# Altium PCB COMM ARM EUTS.PcbDoc
Units mm, origin at the board's own origin, x right, y up, seen from the top; angles counter-clockwise.
Board outline 95.45 x 90.3 mm, 4 copper layers (Top Layer, Ground, Power, Bottom Layer), stack 1.641 mm thick; 55 components, 68 nets, 300 pads, 123 vias.
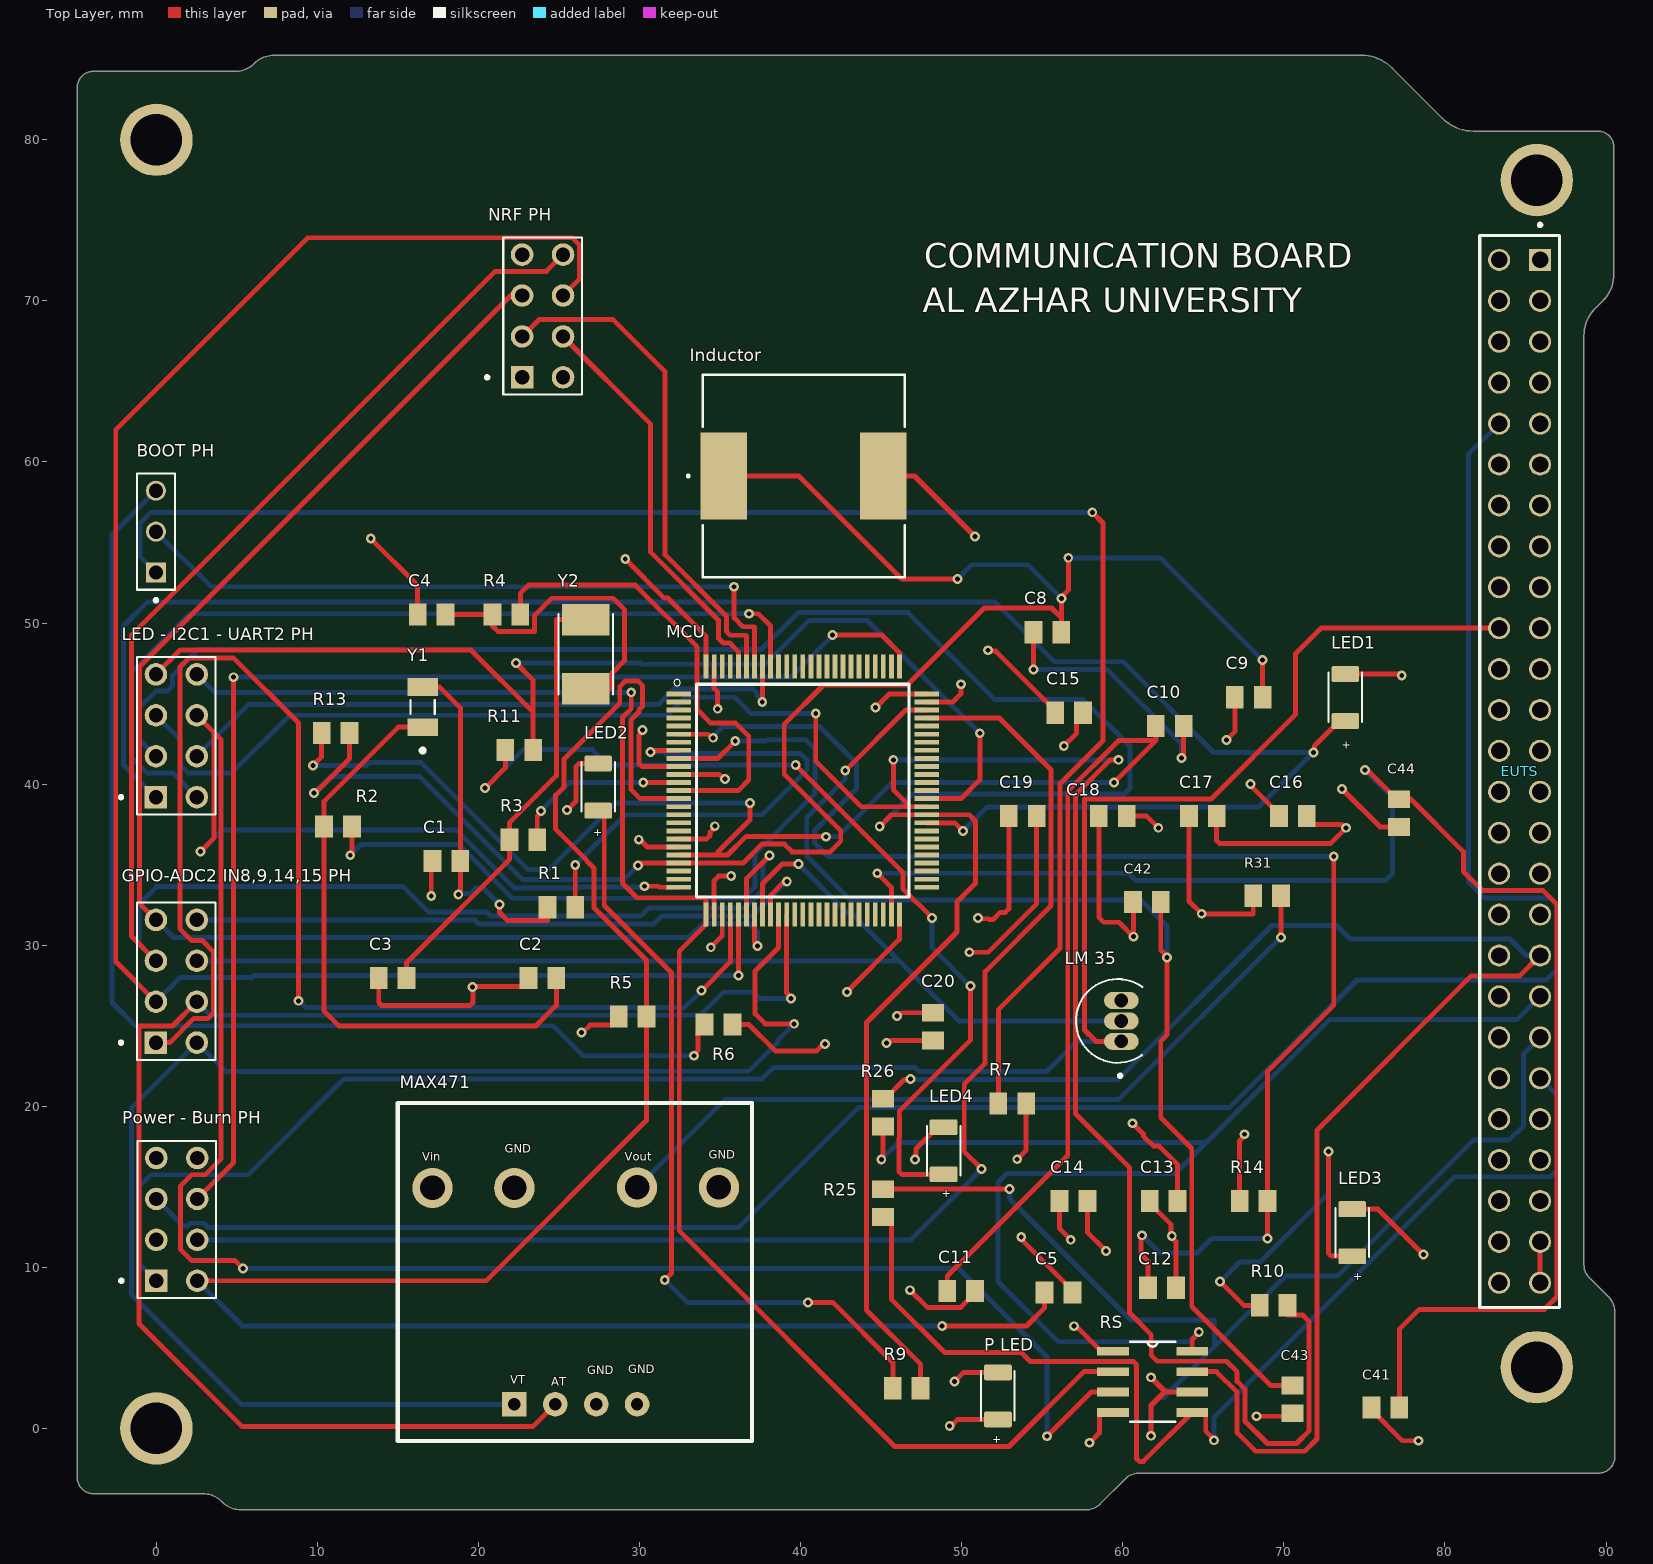
[diagram p0: Top Layer view]
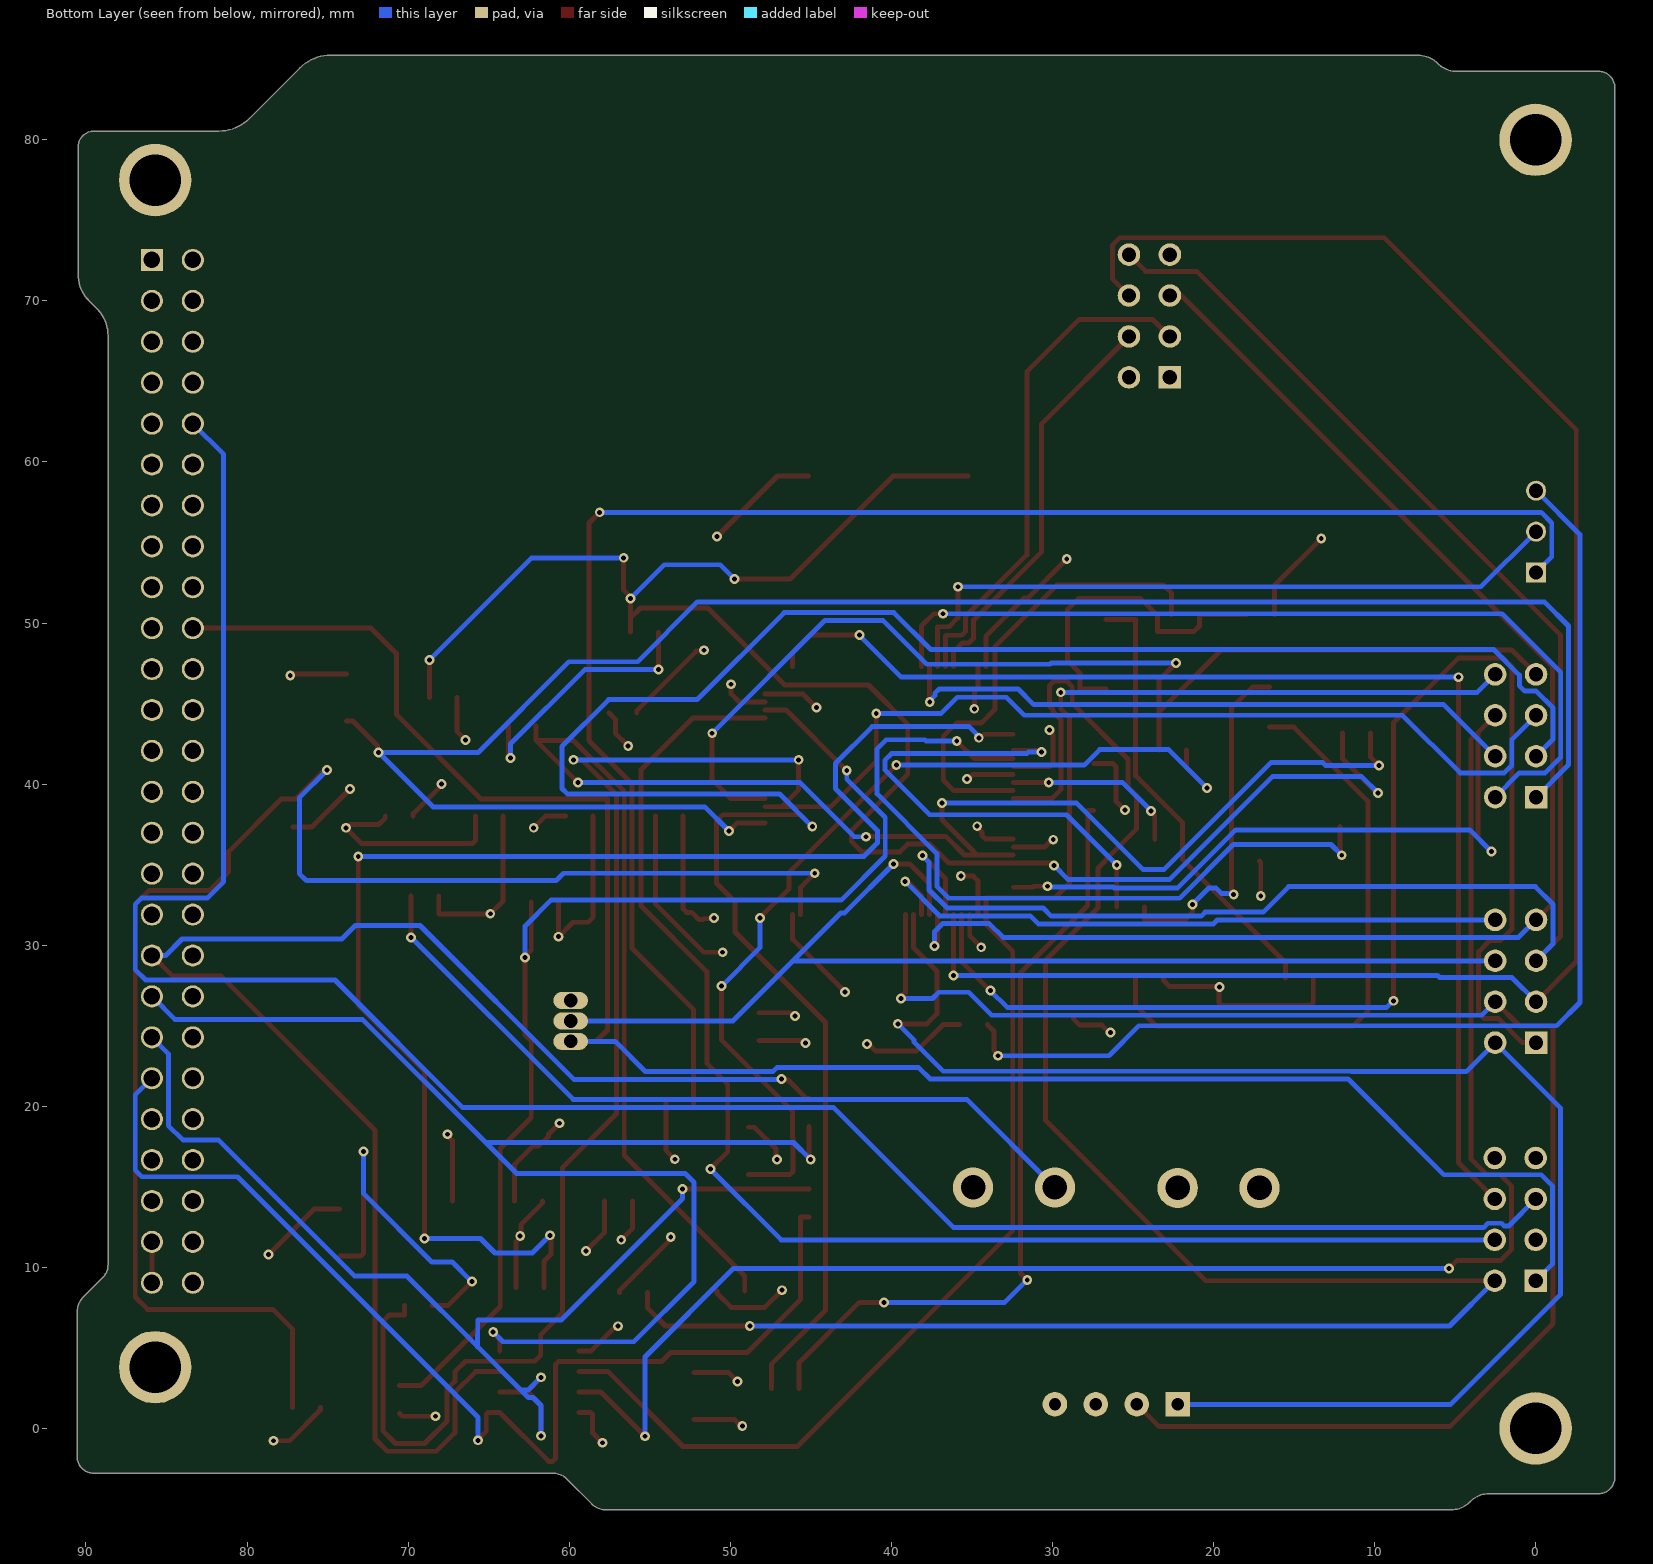
[diagram p1: Bottom Layer view, seen from below]
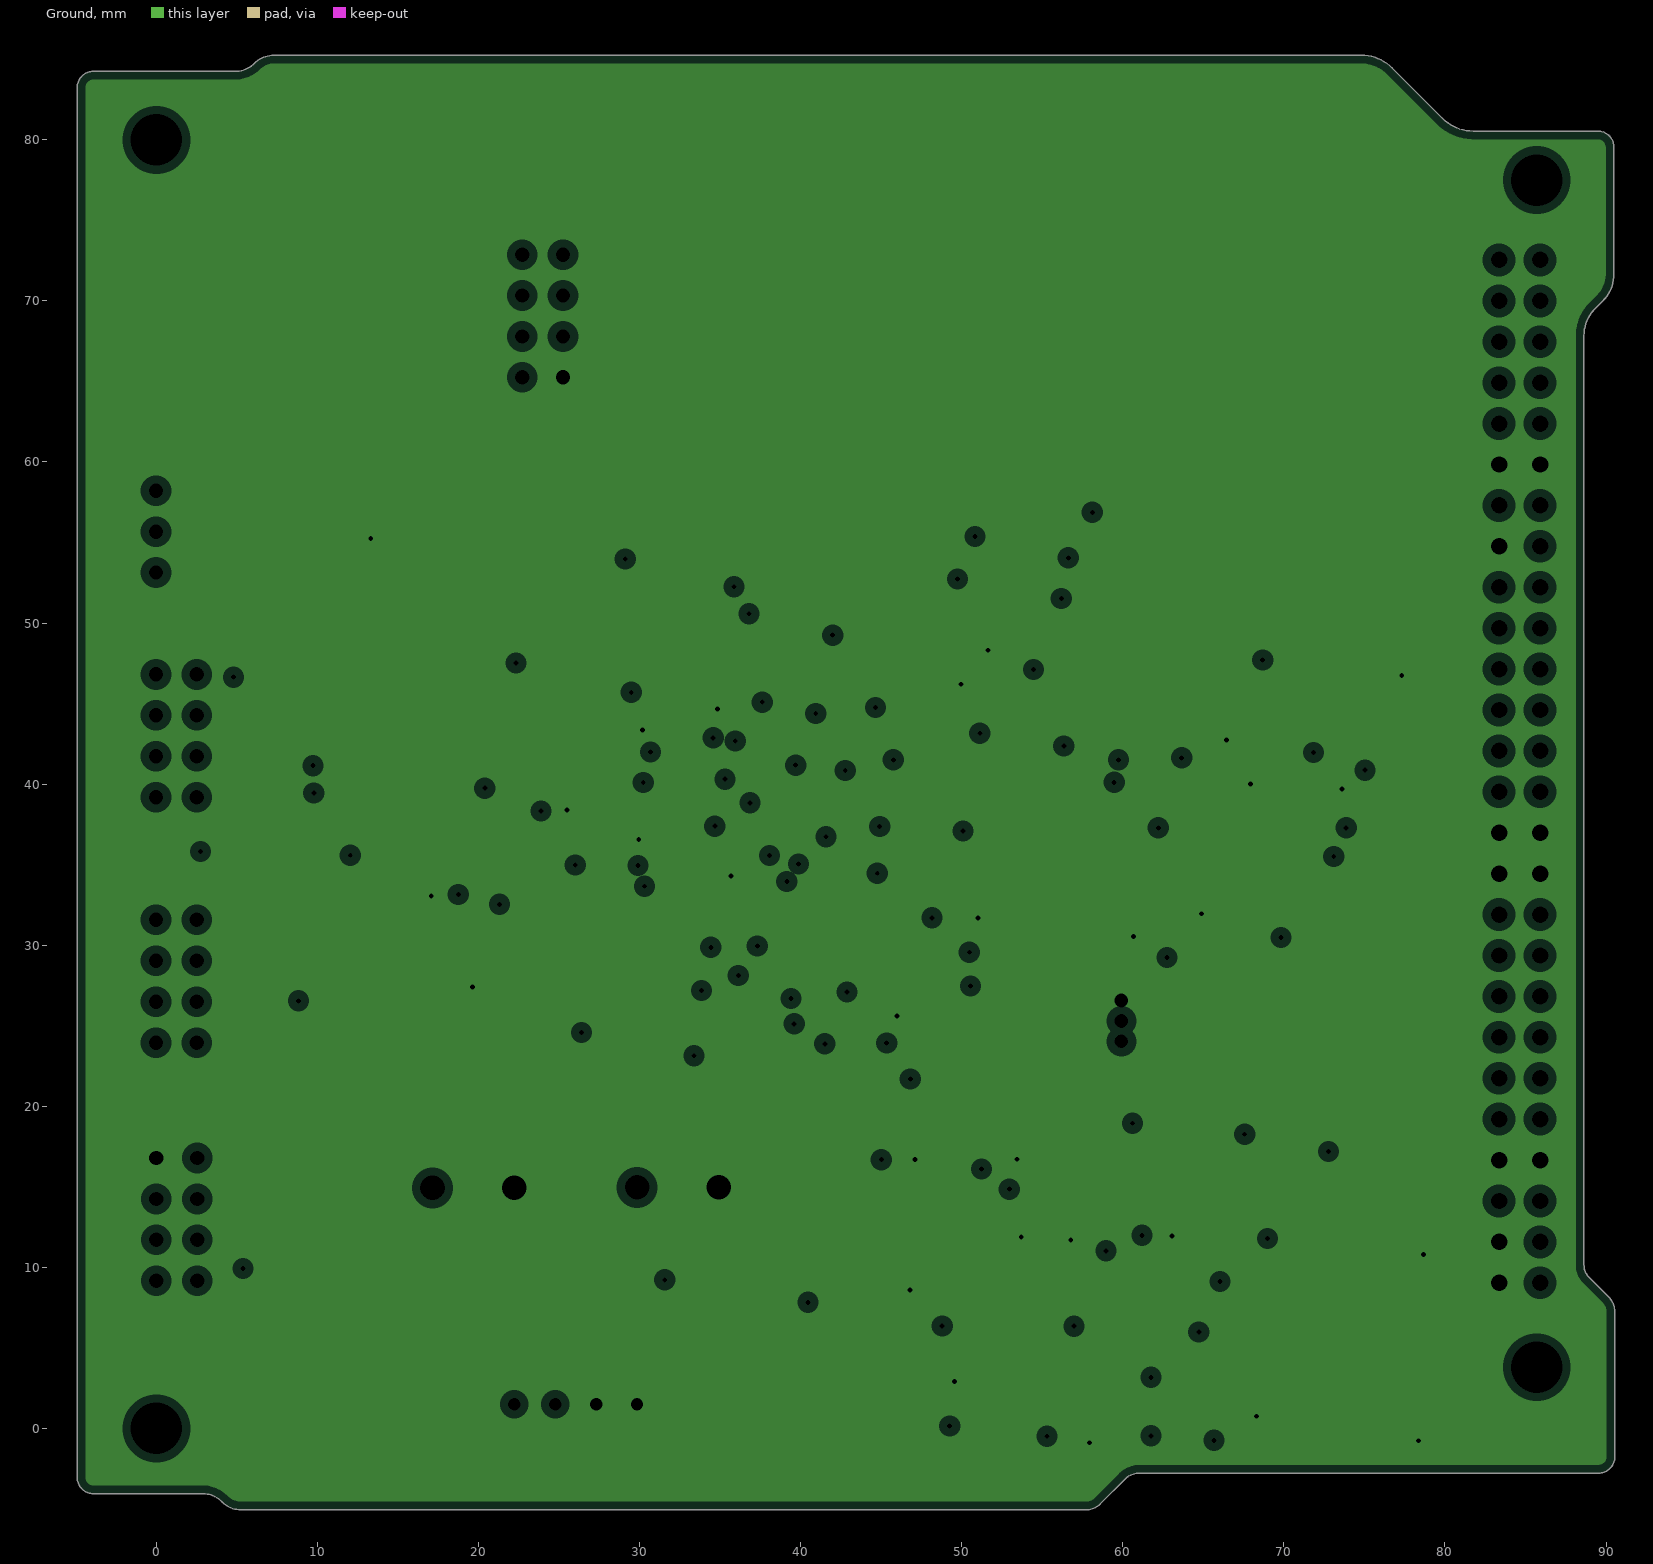
[diagram p2: Ground, clearances drawn from the general rule]
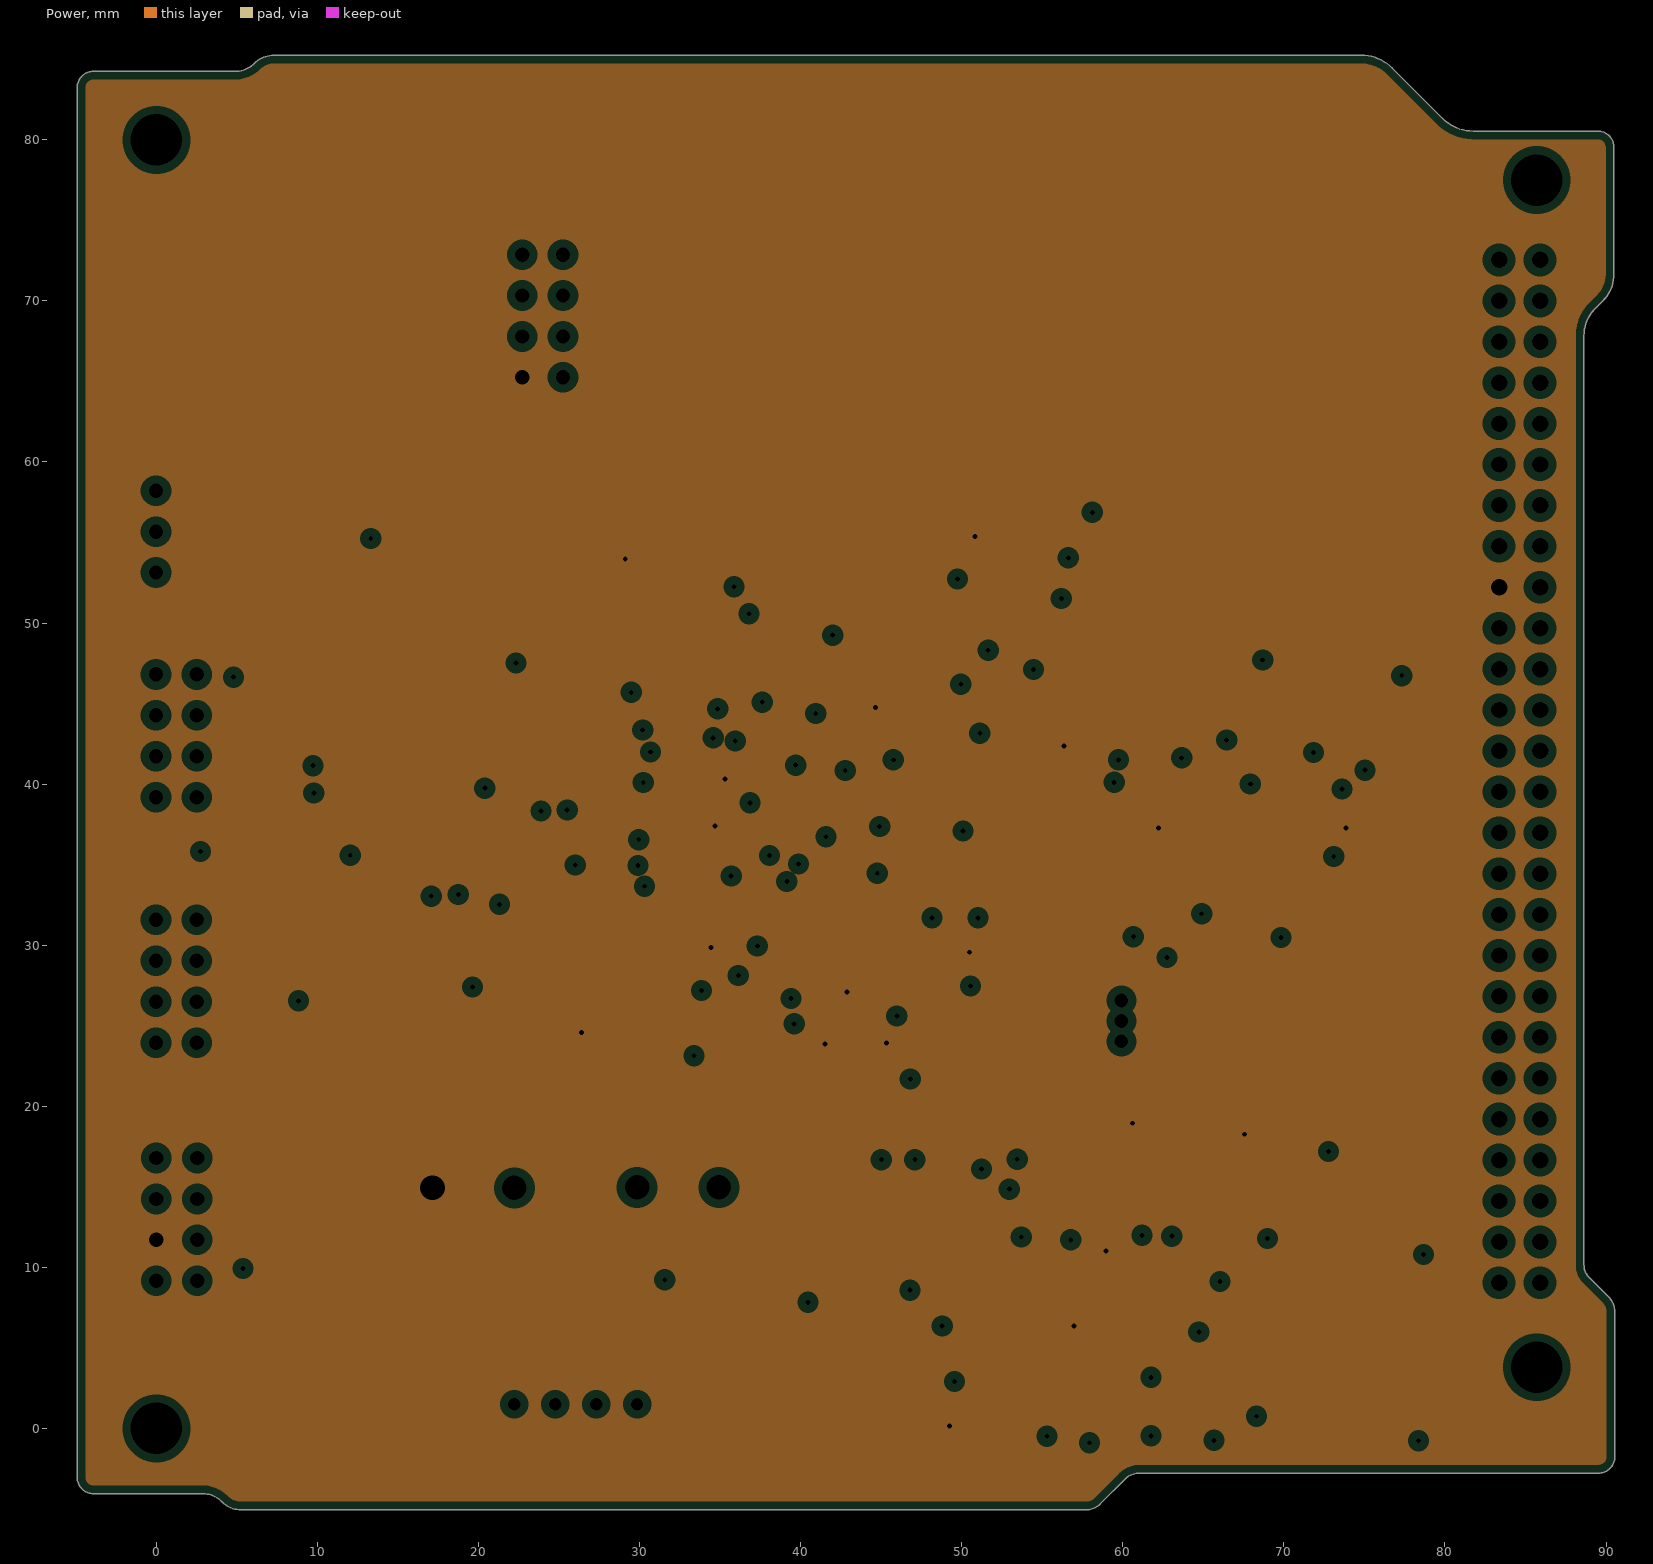
[diagram p3: Power, clearances drawn from the general rule]

## Layer stack, top to bottom
Top Solder: solder mask 0.0102, Solder Resist, Dk 3.5
Top Layer: signal copper 0.0356
Dielectric 1: prepreg 0.1702, FR-4, Dk 4.35
Ground: plane copper 0.0178, net G
Dielectric 3: core 1.1938, FR-4, Dk 4.35
Power: plane copper 0.0178, net 3.3V (COMM)
Dielectric 2: prepreg 0.1702, FR-4, Dk 4.35
Bottom Layer: signal copper 0.0356
Bottom Solder: solder mask 0.0102, Solder Resist, Dk 3.5

## Board outline
2.9,-4.05 cw(c2.9,-5.668) 4.044,-4.524 4.096,-4.576 ccw(c5.24,-3.432) 5.24,-5.05 57.73,-5.05 ccw(c57.73,-3.831) 58.592,-4.693 60.158,-3.127 cw(c61.02,-3.989) 61.02,-2.77 89.54,-2.77 ccw(c89.54,-1.77) 90.54,-1.77 90.54,7.25 ccw(c89.248,7.25) 90.162,8.163 89.625,8.7 88.952,9.373 cw(c89.728,10.15) 88.63,10.15 88.63,67.85 cw(c90.996,67.85) 89.323,69.523 89.797,69.997 ccw(c88.124,71.67) 90.49,71.67 90.49,79.54 ccw(c89.49,79.54) 89.49,80.54 81.75,80.54 cw(c81.75,83.22) 79.855,81.325 76.715,84.465 ccw(c74.82,82.57) 74.82,85.25 7.302,85.25 ccw(c7.302,83.543) 6.095,84.75 cw(c4.888,85.957) 4.888,84.25 -3.91,84.25 ccw(c-3.91,83.25) -4.91,83.25 -4.91,-3.05 ccw(c-3.91,-3.05) -3.91,-4.05

## Design rules (kind name [scope] priority, off if disabled: settings)
Clearance [All] p1: gap=0.254 ignorepadtopadclearanceinfootprint=FALSE except(0: Arc-Hole Track-Hole SMDPad-Hole THPad-Hole Via-Hole Fill-Hole Poly-Hole Region-Hole Text-Hole; 0.178: Arc-Arc Arc-Track Arc-SMDPad Arc-THPad Track-Track Track-SMDPad Track-THPad SMDPad-SMDPad SMDPad-THPad THPad-THPad)
ComponentClearance [All] p1: gap=0.762 collisioncheckmode=3 verticalgap=0.762 showdistances=FALSE
DiffPairsRouting [All] p1: maxlimit=0.254 minlimit=0.254 mostfreqgap=0.254 toplayer_minwidth=0.381 toplayer_maxwidth=0.381 toplayer_prefwidth=0.381 bottomlayer_minwidth=0.381 bottomlayer_maxwidth=0.381 bottomlayer_prefwidth=0.381 substack1={0761D619-B0FF-4D42-81BD-1B94FE1A46B2} toplayer_{0761d619-b0ff-4d42-81bd-1b94fe1a46b2}_minwidth=0.381 toplayer_{0761d619-b0ff-4d42-81bd-1b94fe1a46b2}_maxwidth=0.381 toplayer_{0761d619-b0ff-4d42-81bd-1b94fe1a46b2}_prefwidth=0.381 bottomlayer_{0761d619-b0ff-4d42-81bd-1b94fe1a46b2}_minwidth=0.381 bottomlayer_{0761d619-b0ff-4d42-81bd-1b94fe1a46b2}_maxwidth=0.381 bottomlayer_{0761d619-b0ff-4d42-81bd-1b94fe1a46b2}_prefwidth=0.381 maxuncoupledlength=12.7
HoleSize [All] p1: absolutevalues=TRUE maxlimit=3.302 minlimit=0.025 maxpercent=80.000 minpercent=20.000
HoleToHoleClearance [All] p1: gap=0.152 allowstackedmicrovias=TRUE
MinimumSolderMaskSliver [All] p1: minsoldermaskwidth=0.076
PlaneClearance [All] p1: clearance=0.508
PlaneConnect [All] p1: planeconnectstyle=Relief reliefexpansion=0.508 reliefentries=4 reliefconductorwidth=0.254 reliefairgap=0.254
PolygonConnect [All] p1: connectstyle=Relief reliefconductorwidth=0.254 reliefentries=4 polygonreliefangle="90 Angle" airgapwidth=0.254
RoutingVias [All] p1: holewidth=0.305 width=0.61 viastyle="Through Hole" minholewidth=0.254 minwidth=0.254 maxholewidth=0.305 maxwidth=0.61
SilkToSilkClearance [All] p1: silktosilkclearance=0.102
SilkToSolderMaskClearance [IsPad] p1: minsilkscreentomaskgap=0.102 clearancetoexposedcopper=TRUE
SolderMaskExpansion [All] p1: expansion=0.076 istentingtop=FALSE
Width [All] p1: maxlimit=1.016 minlimit=0.178 preferedwidth=0.305 substack1={0761D619-B0FF-4D42-81BD-1B94FE1A46B2}
21 further rules are at their usual default settings.

## Components (designator, comment, footprint, x,y, rotation, side; value= is the part's Value field where it differs from the comment)
"BOOT PH" "4-103327-5" TE_4-103327-5 -0.025,53.137 r90 top
C1 "6.8pF" CAPC2012X95N 18.009,35.23 r0 top
C2 "6.8pf" CAPC2012X95N 23.97,27.97 r0 top
C3 "20pF" CAPC2012X95N 14.673,27.97 r0 top
C4 "20pf" CAPC2012X95N 17.086,50.525 r0 top
C5 "100nF" CAPC2012X95N 56.007,8.433 r0 top
C8 "100nF" CAPC2012X95N 55.321,49.428 r0 top
C9 "1uF" CAPC2012X95N 67.817,45.39 r0 top
C10 "100nF" CAPC2012X95N 62.916,43.612 r0 top
C11 "1uF" CAPC2012X95N 49.962,8.534 r0 top
C12 "1uF" CAPC2012X95N 62.433,8.738 r0 top
C13 "100nF" CAPC2012X95N 62.527,14.127 r0 top
C14 "100nF" CAPC2012X95N 56.939,14.127 r0 top
C15 "100nF" CAPC2012X95N 56.667,44.425 r0 top
C16 "100nF" CAPC2012X95N 70.553,38.028 r0 top
C17 "100nF" CAPC2012X95N 64.965,38.028 r0 top
C18 "100nF" CAPC2012X95N 59.377,38.028 r0 top
C19 "100nF" CAPC2012X95N 53.789,38.028 r0 top
C20 "100nF" CAPC2012X95N 48.209,24.943 r90 top
C41 "1uF" CAPC2012X95N 76.302,1.295 r0 top
C42 "1uF" CAPC2012X95N 61.493,32.69 r0 top
C43 "1uF" CAPC2012X95N 70.536,1.803 r90 top
C44 "1uF" CAPC2012X95N 77.14,38.202 r90 top
EUTS "ESQ-126-39-G-D" SAMTEC_ESQ-126-39-G-D 85.903,72.542 r90 top locked
"GPIO-ADC2 IN8,9,14,15 PH" "5-146256-4" TE_5-146256-4 1.245,27.762 r90 top
Inductor "CDRH127/LDNP-470MC" IND_CDRH127/LDNP-470MC_SUM 40.183,59.131 r0 top
LED1 "BLUE-LED" RESC3015X65 73.812,45.39 r90 top
LED2 "RED-LED" RESC3015X65 27.432,39.827 r90 top
LED3 "GREEN-LED" RESC3015X65 74.244,12.167 r90 top
LED4 "ORANGE-LED" RESC3015X65 48.87,17.247 r90 top
"LED - I2C1 - UART2 PH" "5-146256-4" TE_5-146256-4 1.245,43.002 r90 top
"LM 35" "LM35DZ/NOPB" TO92127P521H735-3 59.131,25.298 r90 top
MAX471 "MAX471?" PCBComponent_1 22.225,5.182 r0 top
MCU "STM32F427VGT7" QFP50P1600X1600X160-100N 40.132,39.599 r0 top (schematic designator MCU?)
"NRF PH" "5-146256-4" TE_5-146256-4 23.978,69.063 r90 top
"P LED" "BLUE-LED" RESC3015X65 52.248,2.032 r90 top
"Power - Burn PH" "5-146256-4" TE_5-146256-4 1.27,12.979 r90 top
R1 "0" CAPC2012X95N 25.146,32.36 r0 top
R2 "0" CAPC2012X95N 11.278,37.363 r0 top
R3 "0" CAPC2012X95N 22.784,36.551 r0 top
R4 "0" CAPC2012X95N 21.735,50.525 r0 top
R5 "10K" CAPC2012X95N 29.566,25.578 r0 top
R6 "10k" CAPC2012X95N 34.9,25.07 r0 top
R7 "10k" CAPC2012X95N 53.137,20.168 r0 top
R9 "22" CAPC2012X95N 46.584,2.489 r0 top
R10 "22" CAPC2012X95N 69.367,7.645 r0 top
R11 "22" CAPC2012X95N 22.53,42.113 r0 top
R13 "0" CAPC2012X95N 11.125,43.18 r0 top
R14 "0" CAPC2012X95N 68.115,14.127 r0 top
R25 "120" CAPC2012X95N 45.11,13.995 r90 top
R26 "120" CAPC2012X95N 45.11,19.609 r90 top
R31 "330" CAPC2012X95N 68.961,33.071 r0 top
RS "MAX488ESA+" SOIC127P600X175-8N 61.849,2.896 r0 top
Y1 "32.768kHz" XTAL_ECS-.327-12.5-34S-TR 16.535,44.786 r90 top
Y2 "8MHZ" XTAL500X320X130N 26.662,48.061 r90 top

## Footprints (in the part's own frame and the unit in brackets; to place one, negate y for a bottom-side part, rotate by r counter-clockwise, add the part's x,y. Pads: shape width x height; smd on the part's side, far side on the other; paste and mask are expansions set on the pad)
CAPC2012X95N [mm]
  rect 1.1x1.38 smd: 1(-0.863,0) 2(0.863,0)
IND_CDRH127/LDNP-470MC_SUM [mil]
  rect 114x213 smd: 1(-195,0) 2(195,0)
  silkscreen extent -285,-247 247,247
PCBComponent_1 [mil]
  rect 60x60 hole 30: 1(0,-145)
  round 60 hole 30: 2(100,-145) 3(200,-145) 4(300,-145)
  round 98.43 hole 60: 5(500,385) 6(300,385) 7(0,383.86) 8(-200,383.86)
  silkscreen extent -285,-235 581,592
QFP50P1600X1600X160-100N [mm]
  rect 1.5x0.3 smd mask+0.049: 1(-7.7,6) 2(-7.7,5.5) 3(-7.7,5) 4(-7.7,4.5) 5(-7.7,4) 6(-7.7,3.5) 7(-7.7,3) 8(-7.7,2.5) 9(-7.7,2) 10(-7.7,1.5) 11(-7.7,1) 12(-7.7,0.5) 13(-7.7,0) 14(-7.7,-0.5) 15(-7.7,-1) 16(-7.7,-1.5) 17(-7.7,-2) 18(-7.7,-2.5) 19(-7.7,-3) 20(-7.7,-3.5) 21(-7.7,-4) 22(-7.7,-4.5) 23(-7.7,-5) 24(-7.7,-5.5) 25(-7.7,-6) 51(7.7,-6) 52(7.7,-5.5) 53(7.7,-5) 54(7.7,-4.5) 55(7.7,-4) 56(7.7,-3.5) 57(7.7,-3) 58(7.7,-2.5) 59(7.7,-2) 60(7.7,-1.5) 61(7.7,-1) 62(7.7,-0.5) 63(7.7,0) 64(7.7,0.5) 65(7.7,1) 66(7.7,1.5) 67(7.7,2) 68(7.7,2.5) 69(7.7,3) 70(7.7,3.5) 71(7.7,4) 72(7.7,4.5) 73(7.7,5) 74(7.7,5.5) 75(7.7,6)
  rect 0.3x1.5 smd mask+0.049: 26(-6,-7.7) 27(-5.5,-7.7) 28(-5,-7.7) 29(-4.5,-7.7) 30(-4,-7.7) 31(-3.5,-7.7) 32(-3,-7.7) 33(-2.5,-7.7) 34(-2,-7.7) 35(-1.5,-7.7) 36(-1,-7.7) 37(-0.5,-7.7) 38(0,-7.7) 39(0.5,-7.7) 40(1,-7.7) 41(1.5,-7.7) 42(2,-7.7) 43(2.5,-7.7) 44(3,-7.7) 45(3.5,-7.7) 46(4,-7.7) 47(4.5,-7.7) 48(5,-7.7) 49(5.5,-7.7) 50(6,-7.7) 76(6,7.7) 77(5.5,7.7) 78(5,7.7) 79(4.5,7.7) 80(4,7.7) 81(3.5,7.7) 82(3,7.7) 83(2.5,7.7) 84(2,7.7) 85(1.5,7.7) 86(1,7.7) 87(0.5,7.7) 88(0,7.7) 89(-0.5,7.7) 90(-1,7.7) 91(-1.5,7.7) 92(-2,7.7) 93(-2.5,7.7) 94(-3,7.7) 95(-3.5,7.7) 96(-4,7.7) 97(-4.5,7.7) 98(-5,7.7) 99(-5.5,7.7) 100(-6,7.7)
  silkscreen extent -8,-6.6 6.6,6.9
RESC3015X65 [mm]
  rrect20% 0.98x1.72 smd: 1(-1.47,0) 2(1.45,0)
  silkscreen extent -1.53,-1.04 1.53,1.04
SAMTEC_ESQ-126-39-G-D [mm]
  rect 1.37x1.37 hole 1.02: 01(0,0)
  round 1.37 hole 1.02: 02(0,2.54) 03(-2.54,0) 04(-2.54,2.54) 05(-5.08,0) 06(-5.08,2.54) 07(-7.62,0) 08(-7.62,2.54) 09(-10.16,0) 10(-10.16,2.54) 11(-12.7,0) 12(-12.7,2.54) 13(-15.24,0) 14(-15.24,2.54) 15(-17.78,0) 16(-17.78,2.54) 17(-20.32,0) 18(-20.32,2.54) 19(-22.86,0) 20(-22.86,2.54) 21(-25.4,0) 22(-25.4,2.54) 23(-27.94,0) 24(-27.94,2.54) 25(-30.48,0) 26(-30.48,2.54) 27(-33.02,0) 28(-33.02,2.54) 29(-35.56,0) 30(-35.56,2.54) 31(-38.1,0) 32(-38.1,2.54) 33(-40.64,0) 34(-40.64,2.54) 35(-43.18,0) 36(-43.18,2.54) 37(-45.72,0) 38(-45.72,2.54) 39(-48.26,0) 40(-48.26,2.54) 41(-50.8,0) 42(-50.8,2.54) 43(-53.34,0) 44(-53.34,2.54) 45(-55.88,0) 46(-55.88,2.54) 47(-58.42,0) 48(-58.42,2.54) 49(-60.96,0) 50(-60.96,2.54) 51(-63.5,0) 52(-63.5,2.54)
  silkscreen extent -65.02,-1.21 2.27,3.74
SOIC127P600X175-8N [mil]
  rect 78x21 smd: 1(-97,75) 2(-97,25) 3(-97,-25) 4(-97,-75) 5(97,-75) 6(97,-25) 7(97,25) 8(97,75)
  silkscreen extent -55,-98 55,98
TE_4-103327-5 [mm]
  rect 1.24x1.24 hole 0.89: 1(0,0)
  round 1.24 hole 0.89: 2(2.54,0) 3(5.08,0)
  silkscreen extent -1.82,-1.17 6.15,1.17
TE_5-146256-4 [mil]
  rect 55.04x55.04 hole 35.04: 1(-150,50)
  round 55.04 hole 35.04: 2(-50,50) 3(50,50) 4(150,50) 5(-150,-50) 6(-50,-50) 7(50,-50) 8(150,-50)
  silkscreen extent -192,-96 192,139
TO92127P521H735-3 [mm]
  oval 1.07x2.14 hole 0.85 mask+0.051: 1(-1.27,-0.775) 2(0,-0.775) 3(1.27,-0.775)
  silkscreen extent -3.5,-2.08 2.6,2.04, body extent -2.4,-1.53 2.4,2.4, height 8
XTAL500X320X130N [mm]
  rect 1.95x2.95 smd: 1(-2.15,0) 2(2.15,0)
  silkscreen extent -2.5,-1.7 2.5,1.7
XTAL_ECS-.327-12.5-34S-TR [mm]
  rect 1.1x1.9 smd: 1(-1.25,0) 2(1.25,0)
  silkscreen extent -2.8,-0.75 0.44,0.75

## Part data
"BOOT PH": "Conn Unshrouded Header HDR 3 POS 2.54mm Solder ST Thru-Hole Carton", Package=None, Availability=Unavailable, EU_RoHS_Compliance=Compliant, MF="TE Connectivity", MP=4-103327-5, Price=None, SnapEDA_Link=https://www.snapeda.com/parts/4-103327-5/TE%20Connectivity%20AMP%20Connectors/view-part/2403997/?ref=snap, TE_purchase_URL=https://www.te.com/usa-en/product-4-103327-5.html?te_bu=Cor&te_type=disp&te_campaign=seda_glo_cor-seda-global-disp-prtnr-fy19-seda-model-bom-cta_sma-317_1&elqCampaignId=32493
C1 C2 C3 C4 C5 C8 C9 C10 C11 C12 C13 C14 C15 C16 C17 C18 C19 C20 C41 C42 C43 C44: library part UMK212SD103KD-T, "CAP CER 10000PF 50V 0805", Package=None, Availability=Unavailable, MP=UMK212SD103KD-T, Price=None
EUTS: "52 Position Elevated Socket Connector Through Hole", Package=None, Availability=Unavailable, MF=Samtec, MP=ESQ-126-39-G-D, Price=None, SnapEDA_Link=https://www.snapeda.com/parts/ESQ-126-39-G-D/Samtec%20Inc./view-part/490181/?ref=snap
"GPIO-ADC2 IN8,9,14,15 PH" "LED - I2C1 - UART2 PH" "NRF PH" "Power - Burn PH": "08 MODII HDR DRST B/A .100CL LF", Package=None, Availability=Unavailable, MF="TE Connectivity", MP=5-146256-4, Price=None, SnapEDA_Link=https://www.snapeda.com/parts/5-146256-4/TE%20Connectivity%20AMP%20Connectors/view-part/500529/?ref=snap
Inductor: "47ÂµH Shielded Inductor 3.25A 78mOhm Max Nonstandard", Package="Nonstandard Sumida", Check_prices=https://www.snapeda.com/parts/CDRH127/LDNP-470MC/Sumida%20America%20Components%20Inc./view-part/547921/?ref=eda, Digi-Key_Part_Number=308-1339-1-ND, MF="Sumida America", MP=CDRH127/LDNP-470MC, Purchase-URL=https://pricing.snapeda.com/search/part/CDRH127/LDNP-470MC/?ref=eda, SnapEDA_Link=https://www.snapeda.com/parts/CDRH127/LDNP-470MC/Sumida%20America%20Components%20Inc./view-part/547921/?ref=snap
LED1 LED2 LED3 LED4 "P LED": library part LTST-C150TBKT, "LED Blue 470nm LED Indication 3.3V"
"LM 35": "Temperature Sensor Analog, Local 0Â°C ~ 100Â°C 10mV/Â°C TO-92-3", Package="E-PKG AXIAL-LEADED-2 ON Semiconductor", Availability="Not in stock", Check_prices=https://www.snapeda.com/parts/LM35DZ/Texas+Instruments/view-part/?ref=eda, MF="Texas Instruments", MP=LM35DZ, Price=None, SnapEDA_Link=https://www.snapeda.com/parts/LM35DZ/Texas+Instruments/view-part/?ref=snap
MAX471: "MAX471 Voltage And Current Sensor Module Consume Voltage Load Detection Module"
MCU: "ARMÂ® CortexÂ®-M4 STM32F4 Microcontroller IC 32-Bit 180MHz 1MB _1M x 8_ FLASH 100-LQFP _14x14_", Package="LQFP-100 STMicroelectronics", Availability=Unavailable, MF=STMicroelectronics, MP=STM32F427VGT7, Price=None, SnapEDA_Link=https://www.snapeda.com/parts/STM32F427VGT7/STMicroelectronics/view-part/567621/?ref=snap
R1 R2 R3 R4 R5 R6 R7 R9 R10 R11 R13 R14 R25 R26 R31: library part RESISTOR
RS: "1/1 Transceiver Full RS422, RS485 8-SOIC", Package="SOIC-8 Maxim", Availability=Unavailable, MF="Maxim Integrated", MP=MAX488ESA+T, Price=None, SnapEDA_Link=https://www.snapeda.com/parts/MAX488ESA+T/Maxim%20Integrated/view-part/48834/?ref=snap
Y1: library part ECS-.327-12.5-34S-TR, "32.768kHz Â±20ppm Crystal 12.5pF 70 kOhms 2-SMD, No Lead", Package="SMD-2 ECS International", Availability=Unavailable, MF="ECS Inc.", MP=ECS-.327-12.5-34S-TR, Price=None, SnapEDA_Link=https://www.snapeda.com/parts/ECS-.327-12.5-34S-TR/ECS%20Inc./view-part/2454548/?ref=snap
Y2: library part ABM3-8.000MHZ-D2Y-T, "8MHz Â±20ppm Crystal 18pF 140 Ohms 2-SMD, No Lead", Package="SMD-2 Abracon", Digi-Key_Part_Number=535-10630-1-ND, Digi-Key_Purchase_URL=https://www.digikey.com/product-detail/en/abracon-llc/ABM3-8.000MHZ-D2Y-T/535-10630-1-ND/2344632?utm_source=snapeda&utm_medium=aggregator&utm_campaign=symbol, MF=Abracon, MP=ABM3-8.000MHZ-D2Y-T, SnapEDA_Link=https://www.snapeda.com/parts/ABM3-8.000MHZ-D2Y-T/Abracon%20LLC/view-part/106372/?ref=snap

## Free pads (board coordinates)
  round 4.5 hole 3.2 unplated: 1(0,0) 2(0,80) 3(85.7,77.5) 4(85.7,3.8)

## Via types
v1: diameter 0.61, hole 0.305, Top Layer to Bottom Layer, 123 vias

## Nets (pads, with @x,y where several pads share a name; then routed paths per layer and width w, separated by ;. In a path a pad name is that pad's centre, name@x,y a point inside that pad or via, vN(x,y) a via of type N, cw(c..) or ccw(c..) an arc to the next point about the centre after c; other vN are vias at no path point)
3.3V: "Power - Burn PH.3" EUTS.10 | length 133.8
  Bottom Layer w0.305: 0,14.249 1.686,12.563 1.939,12.563 2.114,12.739 2.966,12.739 3.234,12.471 36.132,12.471 43.579,19.918 66.616,19.918 74.536,27.838 86.296,27.838 86.936,28.478 86.936,32.542 86.555,32.923 82.466,32.923 81.45,33.939 81.45,60.47 EUTS.10
"3.3V (ADCS)": EUTS.28
"3.3V (COMM)": "NRF PH.1" "P LED.1" "Power - Burn PH.2" C13.2 C14.2 C15.2 C16.2 C17.2 C18.2 C19.2 C20.1 EUTS.18 Inductor.2 MAX471.8 MCU.11 MCU.19 MCU.28 MCU.50 MCU.75 MCU.100 R5.1 R6.2 R14.1 RS.1 | length 95
  Top Layer w0.305: v1(26.391,24.587) 26.473,24.587 26.926,25.04 28.305,25.04 28.703,25.438 R5.1 ; v1(29.108,53.975) 31.534,51.55 31.765,51.55 34.132,49.183 MCU.100 ; MCU.19 34.168,36.599 34.384,36.814 34.384,37.019 34.671,37.306 v1(34.671,37.389) ; MCU.11 34.935,40.599 35.224,40.31 v1(35.306,40.31) ; v1(34.422,29.87) 35.132,30.581 MCU.28 ; R6.2 36.795,25.07 38.42,23.444 40.989,23.444 41.421,23.876 v1(41.504,23.876) ; v1(42.875,27.102) 46.132,30.359 MCU.50 ; v1(44.653,44.755) 45.497,45.599 MCU.75 ; Inductor.2 47.066,59.131 v1(50.825,55.372) ; v1(45.339,23.927) 45.421,23.927 45.574,24.08 C20.1 ; v1(49.251,0.152) 49.333,0.152 49.743,0.562 52.248,0.562 ; v1(50.47,29.566) 51.648,29.566 54.652,32.57 C19.2 ; v1(56.337,42.367) 57.133,43.163 57.133,44.027 C15.2 ; v1(56.972,6.35) 57.031,6.292 57.17,6.292 58.661,4.801 RS.1 ; C14.2 57.802,12.175 v1(58.953,11.024) ; C18.2 61.463,38.028 v1(62.205,37.287) ; v1(60.604,18.948) 61.275,18.278 61.275,18.151 61.887,17.539 62.242,17.539 63.39,16.391 C13.2 ; C17.2 65.828,36.501 66.007,36.322 72.898,36.322 v1(73.863,37.287) 73.781,37.287 73.577,37.491 71.814,37.491 71.416,37.888 C16.2 ; R14.1 67.252,17.868 67.564,18.18 v1(67.564,18.263)
"3.3V (EPS)": EUTS.08
"3.3v (OBC)": EUTS.22
5V: "LM 35.1" "Power - Burn PH.1" EUTS.20 | length 120.4
  Top Layer w0.305: 59.906,24.028 58.336,24.028 57.625,24.74 57.625,39.07 65.473,39.07 70.731,44.328 70.731,48.108 72.306,49.682 EUTS.20
  Bottom Layer w0.305: 0,9.169 -1.049,10.219 -1.049,15.041 -0.338,15.753 5.707,15.753 11.646,21.692 37.592,21.692 38.303,22.403 47.107,22.403 47.356,22.153 55.263,22.153 57.138,24.028 59.906,24.028
5V(CAMERA): EUTS.06
BOOT0: "BOOT PH.2" MCU.94 | length 43.2
  Top Layer w0.305: v1(35.868,52.252) 35.868,50.322 36.417,49.774 37.132,49.758 MCU.94
  Bottom Layer w0.305: -0.025,55.677 3.399,52.252 v1(35.868,52.252)
CE: "NRF PH.6" MCU.96 | length 25.2
  Top Layer w0.305: 25.248,67.793 30.688,62.352 30.688,54.399 34.903,50.184 34.903,49.052 35.196,48.759 35.589,48.759 36.132,48.216 MCU.96
CSN: "NRF PH.2" MCU.95 | length 31.6
  Top Layer w0.305: 22.708,67.793 23.754,68.839 28.364,68.839 31.59,65.613 31.59,54.234 35.386,50.438 35.386,49.485 35.63,49.242 36.582,49.242 36.632,49.191 MCU.95
"E-RST Hard Reset": EUTS.42
G: "LM 35.3" "NRF PH.5" "P LED.2" "Power - Burn PH.4" C1.1 C2.1 C3.1 C4.1 C5.2 C9.1 C11.2 C12.2 C13.1 C14.1 C15.1 C16.1 C17.1 C18.1 C19.1 C20.2 C41.1 C42.1 C43.1 C44.1 EUTS.11 EUTS.12 EUTS.16 EUTS.29 EUTS.30 EUTS.31 EUTS.32 EUTS.45 EUTS.46 EUTS.50 EUTS.52 LED1.2 LED2.2 LED3.2 LED4.2 MAX471.3 MAX471.4 MAX471.5 MAX471.7 MCU.10 MCU.20 MCU.27 MCU.74 MCU.99 R7.2 R31.1 RS.4 | length 135.5
  Top Layer w0.305: v1(13.31,55.245) 16.223,52.331 C4.1 ; C3.1 13.81,26.442 13.989,26.264 19.481,26.264 19.66,26.442 19.66,27.386 v1(19.634,27.411) 19.655,27.432 22.709,27.432 23.107,27.83 C2.1 ; v1(17.069,33.045) 17.069,35.153 C1.1 ; v1(25.502,38.388) 26.063,38.949 26.063,41.099 26.242,41.277 LED2.2 ; v1(29.947,36.551) 30.029,36.551 30.481,36.099 MCU.20 ; v1(30.189,43.358) 30.189,43.275 29.961,43.047 29.961,41.277 30.139,41.099 MCU.10 ; MCU.27 34.632,34.014 34.908,34.29 v1(35.687,34.29) ; MCU.99 34.632,45.947 34.849,45.73 v1(34.849,44.676) ; v1(45.974,25.603) 46.056,25.603 46.259,25.806 C20.2 ; v1(46.787,8.585) 47.858,7.514 49.945,7.514 50.825,8.394 C11.2 ; v1(47.092,16.688) 47.15,16.746 47.15,17.347 48.5,18.697 LED4.2 ; MCU.74 49.444,45.099 49.947,45.601 v1(49.947,46.203) ; v1(49.555,2.921) 50.116,3.482 52.248,3.482 ; v1(51.003,31.699) 51.062,31.641 51.653,31.641 51.697,31.598 51.949,31.598 52.389,32.037 52.711,32.037 52.926,32.253 C19.1 ; v1(51.638,48.311) 51.697,48.252 52.116,48.252 55.804,44.565 C15.1 ; v1(53.442,16.713) 54,17.271 R7.2 ; v1(53.696,11.887) 53.754,11.829 53.754,11.689 56.87,8.573 C5.2 ; C14.1 56.076,12.402 v1(56.769,11.709) ; v1(57.937,-0.889) 58.547,-0.279 58.547,0.876 58.661,0.991 RS.4 ; C18.1 58.514,31.738 58.826,31.426 59.76,31.426 v1(60.655,30.531) 60.655,32.665 C42.1 ; C13.1 61.664,13.987 62.984,12.667 62.984,11.996 v1(63.043,11.938) 63.043,11.856 63.296,11.602 C12.2 ; C17.1 64.102,32.748 v1(64.897,31.953) 64.901,31.949 68.098,31.949 R31.1 ; v1(66.446,42.744) 66.954,43.252 C9.1 ; v1(67.92,40.005) 67.92,39.939 69.69,38.168 C16.1 ; v1(68.293,0.76) 70.355,0.76 C43.1 ; v1(73.609,39.7) 75.971,37.339 C44.1 ; LED1.2 77.131,46.84 77.235,46.736 v1(77.318,46.736) ; LED3.2 75.842,13.617 v1(78.664,10.795) ; C41.1 75.439,1.155 77.356,-0.762 v1(78.359,-0.762)
MISO: "GPIO-ADC2 IN8,9,14,15 PH.3" "NRF PH.8" MCU.31 | length 108.5
  Top Layer w0.305: -0.025,29.032 -1.537,30.544 -1.537,49.265 21.034,71.836 24.211,71.836 25.248,72.873 ; MCU.31 36.632,34.13 v1(38.067,35.565)
  Bottom Layer w0.305: -0.025,29.032 -1.075,30.081 -1.075,32.542 0.018,33.634 15.334,33.634 16.913,32.055 20.515,32.055 20.765,31.805 30.066,31.805 30.569,32.308 36.538,32.308 37.66,33.431 37.66,35.158 v1(38.067,35.565)
MOSI: "GPIO-ADC2 IN8,9,14,15 PH.4" "NRF PH.3" MCU.32 | length 90.7
  Top Layer w0.305: -0.025,31.572 -1.055,32.601 -1.055,47.274 22.004,70.333 22.708,70.333 ; MCU.32 37.132,30.21 37.313,30.029 v1(37.313,29.947)
  Bottom Layer w0.305: -0.025,31.572 1.062,30.485 33.061,30.485 33.92,31.343 36.823,31.343 37.313,30.854 v1(37.313,29.947)
"NetBOOT PH_1": "BOOT PH.1" R7.1 | length 102.5
  Top Layer w0.305: R7.1 52.274,25.984 56.101,29.811 56.101,40.035 58.768,42.702 58.768,56.215 v1(58.107,56.875)
  Bottom Layer w0.305: -0.025,53.137 -0.998,54.11 -0.998,56.215 -0.338,56.875 v1(58.107,56.875)
"NetBOOT PH_3": "BOOT PH.3" R6.1 | length 72.6
  Top Layer w0.305: v1(33.376,23.139) 33.376,23.222 33.639,23.485 33.639,24.672 R6.1
  Bottom Layer w0.305: -0.025,58.217 -2.751,55.491 -2.751,26.446 -1.303,24.998 24.63,24.998 26.489,23.139 v1(33.376,23.139)
NetC1_2: C1.2 R1.1 Y1.2 | length 22.2
  Top Layer w0.305: Y1.2 17.57,46.036 18.872,44.734 18.872,33.35 18.748,33.226 v1(18.748,33.144) ; v1(21.303,32.537) 21.303,32.034 21.811,31.526 24.283,31.526 R1.1
  Bottom Layer w0.305: v1(18.748,33.144) 18.807,33.202 19.499,33.202 19.854,33.558 20.282,33.558 v1(21.303,32.537)
NetC2_2: C2.2 R2.1 Y1.1 | length 38.1
  Top Layer w0.305: Y1.1 15.007,43.536 10.415,38.943 R2.1 10.415,25.904 11.346,24.973 23.538,24.973 24.833,26.268 C2.2
NetC3_2: C3.2 R3.1 Y2.2 | length 27.9
  Top Layer w0.305: C3.2 15.536,28.926 21.921,35.311 R3.1 21.921,37.597 24.833,40.509 24.833,50.211 Y2.2
NetC4_2: C4.2 R4.1 Y2.1 | length 20.6
  Top Layer w0.305: C4.2 R4.1 20.872,49.814 21.202,49.484 23.487,49.484 23.487,50.474 24.554,51.541 28.364,51.541 29.075,50.83 29.075,47.68 28.288,46.893 28.288,45.911 Y2.1
NetC8_1: C8.1 C10.2 | length 16.3
  Top Layer w0.305: v1(54.458,47.113) C8.1 ; v1(63.652,41.631) 63.652,41.713 63.779,41.839 C10.2
  Bottom Layer w0.305: v1(54.458,47.113) 59.031,47.113 63.652,42.491 v1(63.652,41.631)
NetLED2_1: LED2.1 R9.1 | length 49.3
  Top Layer w0.305: LED2.1 27.805,38.357 27.805,32.466 31.979,28.292 31.979,9.639 v1(31.564,9.225) ; v1(40.454,7.828) 41.987,7.828 45.721,4.094 R9.1
  Bottom Layer w0.305: v1(31.564,9.225) 32.961,7.828 v1(40.454,7.828)
NetLED3_1: LED3.1 R10.1 | length 22.6
  Top Layer w0.305: v1(66.04,9.119) 67.513,7.645 R10.1 ; v1(72.763,17.196) 72.763,10.876 72.942,10.697 LED3.1
  Bottom Layer w0.305: v1(66.04,9.119) 67.258,10.336 68.53,10.336 72.763,14.57 v1(72.763,17.196)
NetLED4_1: LED4.1 R11.1 | length 58
  Top Layer w0.305: v1(20.396,39.751) 20.409,39.751 21.667,41.009 R11.1 ; v1(39.692,41.178) 46.343,34.527 46.343,33.514 v1(48.158,31.699) ; LED4.1 46.28,15.777 46.101,15.955 46.101,18.029 46.131,18.059 46.131,19.433 46.122,19.441 46.122,19.693 50.538,24.109 v1(50.538,27.462)
  Bottom Layer w0.305: v1(20.396,39.751) 22.788,42.143 27.069,42.143 28.034,41.178 v1(39.692,41.178) ; v1(48.158,31.699) 48.158,29.842 v1(50.538,27.462)
NetMAX471_6: MAX471.6 R31.2 | length 49
  Top Layer w0.305: v1(69.817,30.485) 69.824,30.492 R31.2
  Bottom Layer w0.305: MAX471.6 35.311,20.426 59.758,20.426 v1(69.817,30.485)
NRST: "Power - Burn PH.5" C5.1 MCU.14 R5.2 | length 129.7
  Top Layer w0.305: 2.54,9.169 20.472,9.169 30.429,19.126 R5.2 30.429,29.062 27.17,32.321 27.17,34.78 26.72,35.23 26.72,35.275 24.79,37.205 24.79,39.319 25.316,39.845 25.316,41.559 28.77,45.013 28.77,46.055 29.126,46.41 29.888,46.41 30.193,46.106 30.193,44.839 29.964,44.61 29.964,44.483 29.478,43.997 29.478,39.654 30.034,39.099 MCU.14 ; v1(48.786,6.363) 54.018,6.363 55.144,7.489 C5.1
  Bottom Layer w0.305: 2.54,9.169 5.346,6.363 v1(48.786,6.363)
OSC32_IN: MCU.8 R1.2 | length 31.8
  Top Layer w0.305: R1.2 v1(26.009,34.98) ; v1(30.672,42) 30.754,42 30.853,42.099 MCU.8
  Bottom Layer w0.305: v1(26.009,34.98) 29.129,38.1 37.62,38.1 40.404,40.883 40.404,41.473 39.987,41.889 31.586,41.889 31.475,42 v1(30.672,42)
OSC32_OUT: MCU.9 R2.2 | length 48.2
  Top Layer w0.305: v1(12.04,35.585) 12.04,35.668 12.141,35.769 R2.2 ; MCU.9 34.868,41.599 v1(35.941,42.672)
  Bottom Layer w0.305: v1(12.04,35.585) 12.705,36.25 18.763,36.25 22.1,32.913 36.441,32.913 37.178,33.649 37.178,35.684 40.886,39.392 40.886,42.194 40.327,42.753 37.923,42.753 37.842,42.672 v1(35.941,42.672)
OSC_IN: MCU.12 R3.2 | length 11.2
  Top Layer w0.305: R3.2 23.647,38.017 23.876,38.246 v1(23.876,38.329) ; v1(30.226,40.107) 30.232,40.101 32.43,40.101 MCU.12
  Bottom Layer w0.305: v1(23.876,38.329) 25.654,40.107 v1(30.226,40.107)
OSC_OUT: MCU.13 R4.2 | length 29.2
  Top Layer w0.305: R4.2 22.598,51.846 23.106,52.354 29.736,52.354 33.571,48.519 33.571,44.635 34.399,43.807 35.949,43.807 36.779,42.977 36.779,40.259 36.119,39.599 MCU.13
PA2: "LED - I2C1 - UART2 PH.7" MCU.25 RS.3 | length 141.6
  Top Layer w0.305: 2.515,44.272 3.574,43.213 ; v1(2.743,35.814) 3.574,36.644 3.574,43.213 ; v1(5.377,9.936) 4.894,10.419 2.202,10.419 1.491,11.13 1.491,15.041 2.202,15.753 3.04,15.753 4.026,16.739 4.026,42.76 3.574,43.213 ; v1(30.302,33.66) 31.156,33.66 31.217,33.599 MCU.25 ; v1(55.296,-0.483) 58.039,2.261 RS.3
  Bottom Layer w0.305: v1(2.743,35.814) 4.094,37.165 18.61,37.165 22.217,33.558 26.168,33.558 26.218,33.609 30.251,33.609 v1(30.302,33.66) ; v1(5.377,9.936) 49.797,9.936 55.296,4.437 v1(55.296,-0.483)
PA3: "LED - I2C1 - UART2 PH.8" MCU.26 RS.2 | length 100.8
  Top Layer w0.305: v1(29.482,45.699) 29.482,44.683 28.941,44.143 28.941,33.844 29.837,32.948 34.132,32.948 MCU.26 34.132,31.297 32.461,29.627 32.461,12.265 45.844,-1.118 52.934,-1.118 57.582,3.531 RS.2
  Bottom Layer w0.305: 2.515,46.812 3.628,45.699 v1(29.482,45.699)
PA4: "GPIO-ADC2 IN8,9,14,15 PH.1" MCU.29 | length 84.7
  Top Layer w0.305: -0.025,23.952 0.83,23.952 2.334,25.455 3.218,25.455 3.544,25.781 3.544,29.6 2.862,30.281 2.202,30.281 1.465,31.018 1.465,47.274 2.033,47.841 4.784,47.841 8.831,43.794 v1(8.831,26.548) ; v1(33.85,27.183) 35.632,28.964 MCU.29
  Bottom Layer w0.305: v1(8.831,26.548) 9.242,26.137 32.805,26.137 v1(33.85,27.183)
PA5: "GPIO-ADC2 IN8,9,14,15 PH.2" "NRF PH.7" MCU.30 | length 114.6
  Top Layer w0.305: -0.025,26.492 -2.522,28.989 -2.522,62.006 9.39,73.919 25.824,73.919 26.281,73.461 26.281,71.366 25.248,70.333 ; v1(36.132,28.122) MCU.30
  Bottom Layer w0.305: -0.025,26.492 1.478,27.995 5.961,27.995 6.088,28.122 v1(36.132,28.122)
PA13: "Power - Burn PH.6" MCU.72 | length 87
  Top Layer w0.305: MCU.72 52.342,44.099 55.542,40.899 55.542,32.453 51.453,28.364 51.453,22.661 50.157,21.366 50.157,17.178 v1(51.232,16.104)
  Bottom Layer w0.305: 2.54,11.709 46.838,11.709 v1(51.232,16.104)
PA14: "Power - Burn PH.7" MCU.76 | length 77.1
  Top Layer w0.305: 2.54,14.249 4.793,16.502 v1(4.793,46.639) ; v1(41.986,49.251) 45.047,49.251 46.13,48.168 46.13,47.301 MCU.76
  Bottom Layer w0.305: v1(4.793,46.639) 39.375,46.639 v1(41.986,49.251)
PB0: "GPIO-ADC2 IN8,9,14,15 PH.5" MAX471.1 MCU.35 | length 92.5
  Top Layer w0.305: MCU.35 38.632,29.856 37.177,28.401 37.177,25.739 37.795,25.121 v1(39.599,25.121)
  Bottom Layer w0.305: MAX471.1 5.28,1.499 -1.532,8.31 -1.532,19.906 2.515,23.952 4.318,22.149 11.421,22.149 11.446,22.174 36.779,22.174 38.581,23.976 38.581,24.103 v1(39.599,25.121)
PB1: "GPIO-ADC2 IN8,9,14,15 PH.6" MAX471.2 MCU.36 | length 95
  Top Layer w0.305: 2.515,26.492 1.004,24.981 -1.055,24.981 -1.075,24.961 -1.075,6.507 5.301,0.132 23.398,0.132 MAX471.2 ; MCU.36 39.132,27.041 39.395,26.778 v1(39.395,26.695)
  Bottom Layer w0.305: 2.515,26.492 3.352,25.654 33.77,25.654 35.197,27.081 37.062,27.081 37.448,26.695 v1(39.395,26.695)
PB6: "LED - I2C1 - UART2 PH.5" MCU.92 | length 54.4
  Top Layer w0.305: v1(36.797,50.576) 37.37,50.576 38.132,49.814 MCU.92
  Bottom Layer w0.305: 2.515,39.192 1.011,40.695 -0.592,40.695 -1.557,41.661 -1.557,46.944 2.075,50.576 v1(36.797,50.576)
PB7: "LED - I2C1 - UART2 PH.6" MCU.93 | length 39.5
  Top Layer w0.305: v1(37.617,45.09) 37.63,45.102 37.63,47.296 MCU.93
  Bottom Layer w0.305: 2.515,41.732 5.715,44.933 31.154,44.933 32.123,45.902 37.029,45.902 37.298,45.633 37.298,45.491 37.617,45.172 v1(37.617,45.09)
PC4: "GPIO-ADC2 IN8,9,14,15 PH.7" "LM 35.2" MCU.33 | length 72.3
  Top Layer w0.305: MCU.33 37.632,33.807 38.869,35.043 v1(39.868,35.043)
  Bottom Layer w0.305: 2.515,29.032 46.102,29.032 ; v1(39.868,35.043) 42.903,32.009 43.126,32.009 46.102,29.032 ; 59.906,25.298 49.836,25.298 46.102,29.032
PC5: "GPIO-ADC2 IN8,9,14,15 PH.8" MCU.34 | length 40.4
  Top Layer w0.305: MCU.34 38.132,33.104 38.929,33.901 39.083,33.901 v1(39.141,33.96)
  Bottom Layer w0.305: 2.515,31.572 19.751,31.572 20.001,31.323 30.879,31.323 31.382,31.826 37.007,31.826 v1(39.141,33.96)
PD12: "LED - I2C1 - UART2 PH.1" LED1.1 MCU.59 | length 119
  Top Layer w0.305: MCU.59 49.573,37.599 v1(50.081,37.091) ; v1(71.831,41.961) 71.89,42.019 71.89,42.367 73.442,43.92 LED1.1
  Bottom Layer w0.305: -0.025,39.192 -2.04,41.207 -2.04,49.814 -0.543,51.311 52.039,51.311 55.754,47.595 60.021,47.595 65.656,41.961 v1(71.831,41.961) 68.458,38.587 51.578,38.587 v1(50.081,37.091)
PD13: "LED - I2C1 - UART2 PH.2" MCU.60 R9.2 | length 136.2
  Top Layer w0.305: v1(44.907,37.363) 45.642,38.099 MCU.60 50.462,38.099 50.851,37.71 50.851,33.833 49.708,32.69 49.708,30.823 44.087,25.201 44.087,7.345 47.447,3.985 R9.2
  Bottom Layer w0.305: -0.025,41.732 -1.075,42.781 -1.075,44.734 -0.033,45.775 0.678,45.775 1.008,46.106 1.008,46.766 2.599,48.357 37.549,48.357 39.84,50.648 46.657,50.648 52.062,45.242 57.547,45.242 60.444,42.344 60.444,39.73 60.114,39.4 46.944,39.4 v1(44.907,37.363)
PD14: "LED - I2C1 - UART2 PH.3" MCU.61 R10.2 | length 137.2
  Top Layer w0.305: v1(40.937,44.378) 40.937,41.418 43.756,38.599 46.807,38.599 ; v1(45.752,41.508) 45.752,39.654 46.807,38.599 ; MCU.61 46.807,38.599 ; v1(59.733,41.508) 59.225,41.508 57.066,39.349 57.066,19.537 60.419,16.184 60.419,7.167 61.765,5.821 61.765,4.551 62.146,4.17 66.439,4.17 67.099,3.51 67.099,2.922 67.582,2.44 67.582,0.465 68.982,-0.935 70.782,-0.935 71.569,-0.148 71.569,6.634 71.163,7.04 70.23,7.04 R10.2
  Bottom Layer w0.305: -0.025,44.272 1.485,42.761 1.485,41.158 1.948,40.695 4.691,40.695 8.273,44.277 31.742,44.277 32.86,45.394 35.908,45.394 36.924,44.378 v1(40.937,44.378) ; v1(45.752,41.508) v1(59.733,41.508)
PD15: "LED - I2C1 - UART2 PH.4" MCU.62 R11.2 | length 71
  Top Layer w0.305: -0.025,46.812 1.486,48.324 19.523,48.324 23.393,44.455 ; v1(22.327,47.523) 23.393,46.457 23.393,44.455 ; R11.2 23.393,44.455 ; MCU.62 49.954,39.099 51.122,40.267 v1(51.122,43.159)
  Bottom Layer w0.305: v1(22.327,47.523) 30.065,47.523 30.147,47.441 37.802,47.441 40.526,50.165 44.117,50.165 v1(51.122,43.159)
"RD + (OBC-ADCS)": EUTS.21
"RD + (OBC-COMM)": EUTS.41 R25.1 RS.5 | length 71.1
  Top Layer w0.305: R25.1 45.636,13.132 45.636,8.031 48.963,4.704 53.713,4.704 54.272,4.145 60.67,4.145 60.849,3.966 60.849,-1.864 61.027,-2.043 61.28,-2.043 RS.5 65.037,0.991 65.151,0.876 65.151,-0.167 65.659,-0.675 v1(65.659,-0.737)
  Bottom Layer w0.305: v1(65.659,-0.737) 65.659,0.694 80.591,15.626 86.53,15.626 86.936,16.032 86.936,20.709 EUTS.41
"RD + (OBC-EPS)": EUTS.01
"RD - (OBC-ADCS)": EUTS.19
"RD - (OBC-COMM)": EUTS.39 R25.2 RS.6 | length 71.7
  Top Layer w0.305: R25.2 v1(52.956,14.858) ; v1(61.747,-0.457) 61.747,1.422 62.586,2.261 RS.6 ; v1(61.747,3.175) 61.747,3.16 62.647,2.261
  Bottom Layer w0.305: v1(52.956,14.858) 52.956,14.277 60.498,6.736 65.677,6.736 65.686,5.069 ; v1(61.747,-0.457) 61.747,1.422 62.245,1.92 62.538,1.92 63.005,2.388 ; v1(61.747,3.175) 61.754,3.175 62.541,2.388 63.005,2.388 ; EUTS.39 84.879,23.259 84.879,18.801 83.99,17.912 81.78,17.912 73.322,9.453 70.071,9.453 65.686,5.069 ; 63.005,2.388 65.686,5.069
"RD - (OBC-EPS)": EUTS.02
"RST Soft-Reset": EUTS.25
"Solar Array Input": EUTS.24
"TD + (OBC-ADCS)": EUTS.17
"TD + (OBC-COMM)": EUTS.37 R26.1 RS.8 | length 83
  Top Layer w0.305: v1(45.009,16.688) 45.009,16.77 45.11,16.872 R26.1 ; RS.8 64.313,5.524 64.719,5.931 v1(64.719,5.994)
  Bottom Layer w0.305: v1(45.009,16.688) 46.076,17.755 65.189,17.755 ; v1(64.719,5.994) 64.11,5.385 55.982,5.385 52.24,9.126 52.24,15.27 52.794,15.824 63.259,15.824 65.189,17.755 ; EUTS.37 84.46,25.379 72.814,25.379 65.189,17.755
"TD + (OBC-EPS)": EUTS.03
"TD - (OBC-ADCS)": EUTS.15
"TD - (OBC-COMM)": EUTS.35 R26.2 RS.7 | length 95.1
  Top Layer w0.305: R26.2 45.25,20.472 46.412,21.633 46.754,21.633 v1(46.812,21.692) ; RS.7 65.808,3.531 67.099,2.24 67.099,-0.275 68.242,-1.418 71.29,-1.418 72.052,-0.656 72.052,18.521 81.628,28.097 84.637,28.097 EUTS.35
  Bottom Layer w0.305: v1(46.812,21.692) 46.833,21.671 59.708,21.671 69.258,31.221 73.271,31.221 74.109,30.383 84.036,30.383 85.057,29.362 EUTS.35
"TD - (OBC-EPS)": EUTS.04
"UART-Rx (OBC-CAM)": EUTS.38
"UART-Tx (OBC-CAM)": EUTS.36
VBAT: C12.1 MCU.6 R14.2 | length 88.5
  Top Layer w0.305: MCU.6 34.264,43.099 34.487,42.875 v1(34.569,42.875) ; 61.13,11.238 61.13,10.807 61.57,10.367 C12.1 ; 61.13,11.238 61.13,11.93 v1(61.189,11.989) ; v1(68.978,11.79) R14.2 68.978,22.153 73.093,26.269 v1(73.093,35.514)
  Bottom Layer w0.305: v1(34.569,42.875) 34.569,42.958 34.957,43.345 34.957,43.35 35.172,43.566 41.191,43.566 43.477,41.28 43.477,39.73 40.861,37.114 40.861,36.352 41.699,35.514 v1(73.093,35.514) ; v1(61.189,11.989) 62.288,10.889 64.604,10.889 65.504,11.79 v1(68.978,11.79)
VBAT+: EUTS.49 EUTS.51 | length 2.5
  Top Layer w0.305: EUTS.51 EUTS.49
VCAP_1: C41.2 C44.2 MCU.49 | length 98.4
  Top Layer w0.305: v1(44.755,34.468) 45.632,33.591 MCU.49 ; v1(75.032,40.869) 75.09,40.81 75.254,40.81 77,39.065 77.894,39.065 81.145,35.813 81.145,34.574 82.314,33.406 86.073,33.406 86.936,32.542 86.936,8.158 86.174,7.396 78.402,7.396 77.165,6.159 C41.2
  Bottom Layer w0.305: v1(44.755,34.468) 60.352,34.468 60.805,34.015 76.319,34.015 76.751,34.447 76.751,39.149 v1(75.032,40.869)
VCAP_2: C42.2 C43.2 MCU.73 | length 73.5
  Top Layer w0.305: v1(42.766,40.839) 46.525,44.599 MCU.73 ; C42.2 62.356,29.699 62.738,29.318 62.738,24.418 62.356,24.036 62.356,19.301 64.28,17.378 64.28,7.574 69.187,2.666 C43.2
  Bottom Layer w0.305: v1(42.766,40.839) 42.766,40.314 40.378,37.927 40.378,35.539 43.121,32.796 61.137,32.796 62.738,31.195 v1(62.738,29.235)
VDDA: C8.2 C9.2 Inductor.1 MCU.22 R13.2 | length 117.6
  Top Layer w0.305: v1(9.779,39.446) 9.855,39.446 11.988,41.579 R13.2 ; v1(29.896,34.95) 29.978,34.95 30.126,35.099 MCU.22 36.418,35.099 37.596,36.276 38.992,36.276 39.475,35.793 41.826,35.793 42.486,36.454 42.486,37.114 38.981,40.619 38.981,43.718 41.42,46.156 46.627,46.156 51.402,50.932 55.574,50.932 56.184,50.322 ; Inductor.1 39.888,59.131 46.288,52.73 v1(49.733,52.73) ; C8.2 56.184,50.322 ; v1(56.617,54.051) 56.617,52.044 56.184,51.611 56.184,50.322 ; C9.2 v1(68.68,47.7)
  Bottom Layer w0.305: v1(9.779,39.446) 10.795,40.462 16.35,40.462 22.721,34.091 29.037,34.091 v1(29.896,34.95) ; v1(49.733,52.73) 50.622,53.619 54.093,53.619 v1(56.184,51.529) ; v1(56.617,54.051) 62.329,54.051 v1(68.68,47.7)
VREF+: C10.1 C11.1 MCU.21 R13.1 | length 112.4
  Top Layer w0.305: v1(9.728,41.148) 9.728,41.158 10.262,41.692 R13.1 ; MCU.21 34.714,35.599 ; v1(36.855,38.837) 36.855,37.783 34.903,35.83 34.903,35.787 34.714,35.599 ; v1(41.572,36.733) 41.547,36.758 36.621,36.758 35.462,35.599 34.714,35.599 ; C11.1 49.099,9.462 56.583,16.946 56.583,39.552 59.733,42.702 62.053,42.702 ; v1(59.462,40.111) 62.053,42.702 ; C10.1 62.053,42.702
  Bottom Layer w0.305: v1(9.728,41.148) 13.038,41.148 13.22,41.33 16.447,41.33 23.065,34.712 24.388,34.712 28.512,38.837 v1(36.855,38.837) ; v1(41.572,36.733) 42.309,36.733 45.687,40.111 v1(59.462,40.111)
pads on no net: "NRF PH.4" "Power - Burn PH.8" EUTS.05 EUTS.07 EUTS.09 EUTS.13 EUTS.14 EUTS.23 EUTS.26 EUTS.27 EUTS.33 EUTS.34 EUTS.40 EUTS.43 EUTS.44 EUTS.47 EUTS.48 MCU.1 MCU.2 MCU.3 MCU.4 MCU.5 MCU.7 MCU.15 MCU.16 MCU.17 MCU.18 MCU.23 MCU.24 MCU.37 MCU.38 MCU.39 MCU.40 MCU.41 MCU.42 MCU.43 MCU.44 MCU.45 MCU.46 MCU.47 MCU.48 MCU.51 MCU.52 MCU.53 MCU.54 MCU.55 MCU.56 MCU.57 MCU.58 MCU.63 MCU.64 MCU.65 MCU.66 MCU.67 MCU.68 MCU.69 MCU.70 MCU.71 MCU.77 MCU.78 MCU.79 MCU.80 MCU.81 MCU.82 MCU.83 MCU.84 MCU.85 MCU.86 MCU.87 MCU.88 MCU.89 MCU.90 MCU.91 MCU.97 MCU.98

## Polygon pours and split planes (outlines as drawn)
G on Ground (split plane): 175 vertices, not listed, extent -4.401,-4.541 90.031,84.741
"3.3V (COMM)" on Power (split plane): 175 vertices, not listed, extent -4.401,-4.541 90.031,84.741

## Silkscreen, mask and mechanical layers (free items; w line width, h text height)
Top Overlay:
  text "COMMUNICATION BOARD" at 47.676,72.06 h1.52
  text "AL AZHAR UNIVERSITY" at 47.574,69.291 h1.52
  text "+" at 73.584,42.206 h0.51
  text "+" at 27.127,36.771 h0.51
  text "+" at 48.768,14.343 h0.51
  text "+" at 74.32,9.212 h0.51
  text "+" at 51.892,-0.923 h0.51
Mechanical 1:
  lines w0.254: -4.91,-3.05 ccw(c-3.91,-3.05) -3.91,-4.05 2.9,-4.05 cw(c2.9,-5.668) 4.044,-4.524 4.096,-4.576 ccw(c5.24,-3.432) 5.24,-5.05 57.73,-5.05 ccw(c57.73,-3.831) 58.592,-4.693 60.158,-3.127 cw(c61.02,-3.989) 61.02,-2.77 89.54,-2.77 ccw(c89.54,-1.77) 90.54,-1.77 90.54,7.25 ccw(c89.248,7.25) 90.162,8.163 89.625,8.7 88.952,9.373 cw(c89.728,10.15) 88.63,10.15 88.63,67.85 cw(c90.996,67.85) 89.323,69.523 89.797,69.997 ccw(c88.124,71.67) 90.49,71.67 90.49,79.54 ccw(c89.49,79.54) 89.49,80.54 81.75,80.54 cw(c81.75,83.22) 79.855,81.325 76.715,84.465 ccw(c74.82,82.57) 74.82,85.25 7.44,85.25 7.302,85.25 ccw(c7.302,83.543) 6.095,84.75 cw(c4.888,85.957) 4.888,84.25 4.75,84.25 -3.91,84.25 ccw(c-3.91,83.25) -4.91,83.25 -4.91,-3.05

## Text inside footprints (layer, text, board x,y; h text height)
MAX471: Top Overlay "Vin" at 16.51,16.612 h0.52; Top Overlay "GND" at 21.641,17.12 h0.52; Top Overlay "Vout" at 29.083,16.612 h0.52; Top Overlay "GND" at 34.29,16.739 h0.52; Top Overlay "VT" at 21.971,2.769 h0.52; Top Overlay "AT" at 24.511,2.642 h0.52; Top Overlay "GND" at 26.746,3.353 h0.52; Top Overlay "GND" at 29.312,3.429 h0.52